# Altium PCB Glucometer-E.C.- Full V1.PcbDoc
Units mm, origin at the board's own origin, x right, y up, seen from the top; angles counter-clockwise.
Board outline 152.4 x 101.6 mm, 2 copper layers (Top Layer, Bottom Layer); 12 components, 68 nets, 98 pads, 0 vias.
Unrouted connection lines stored in the file: 21.
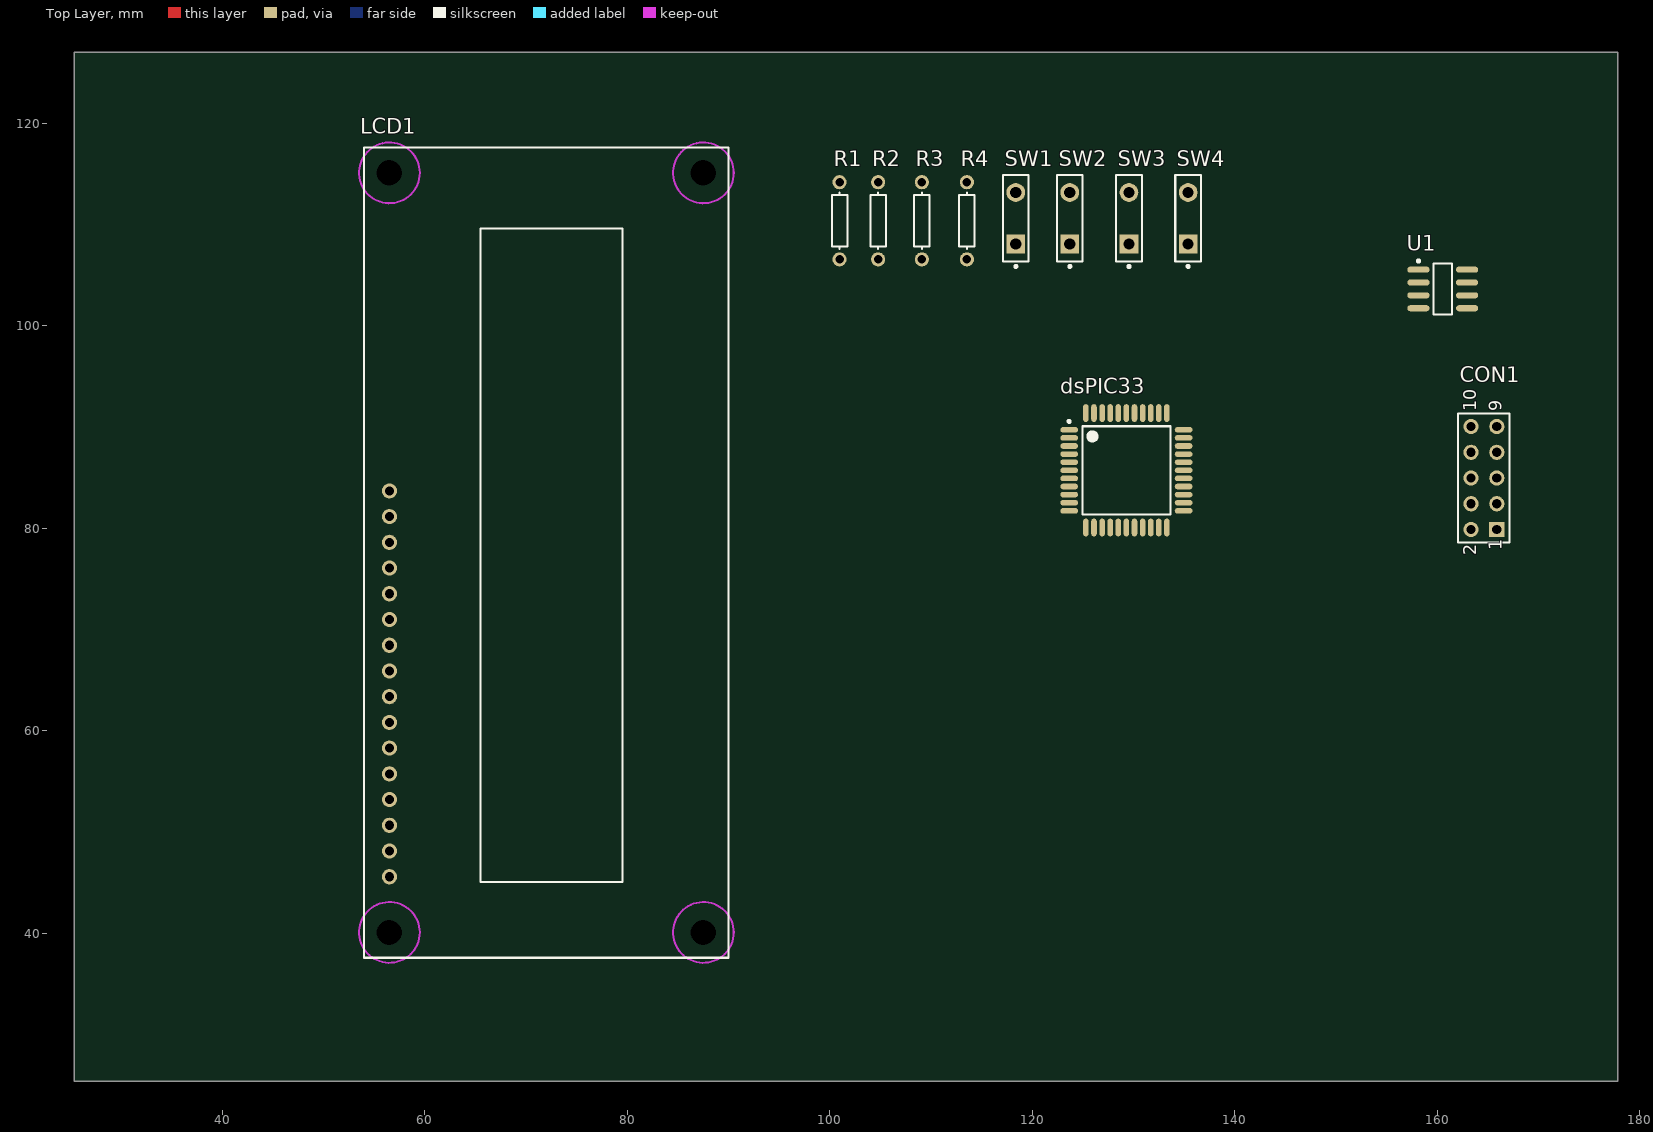
[diagram p0: Top Layer view]
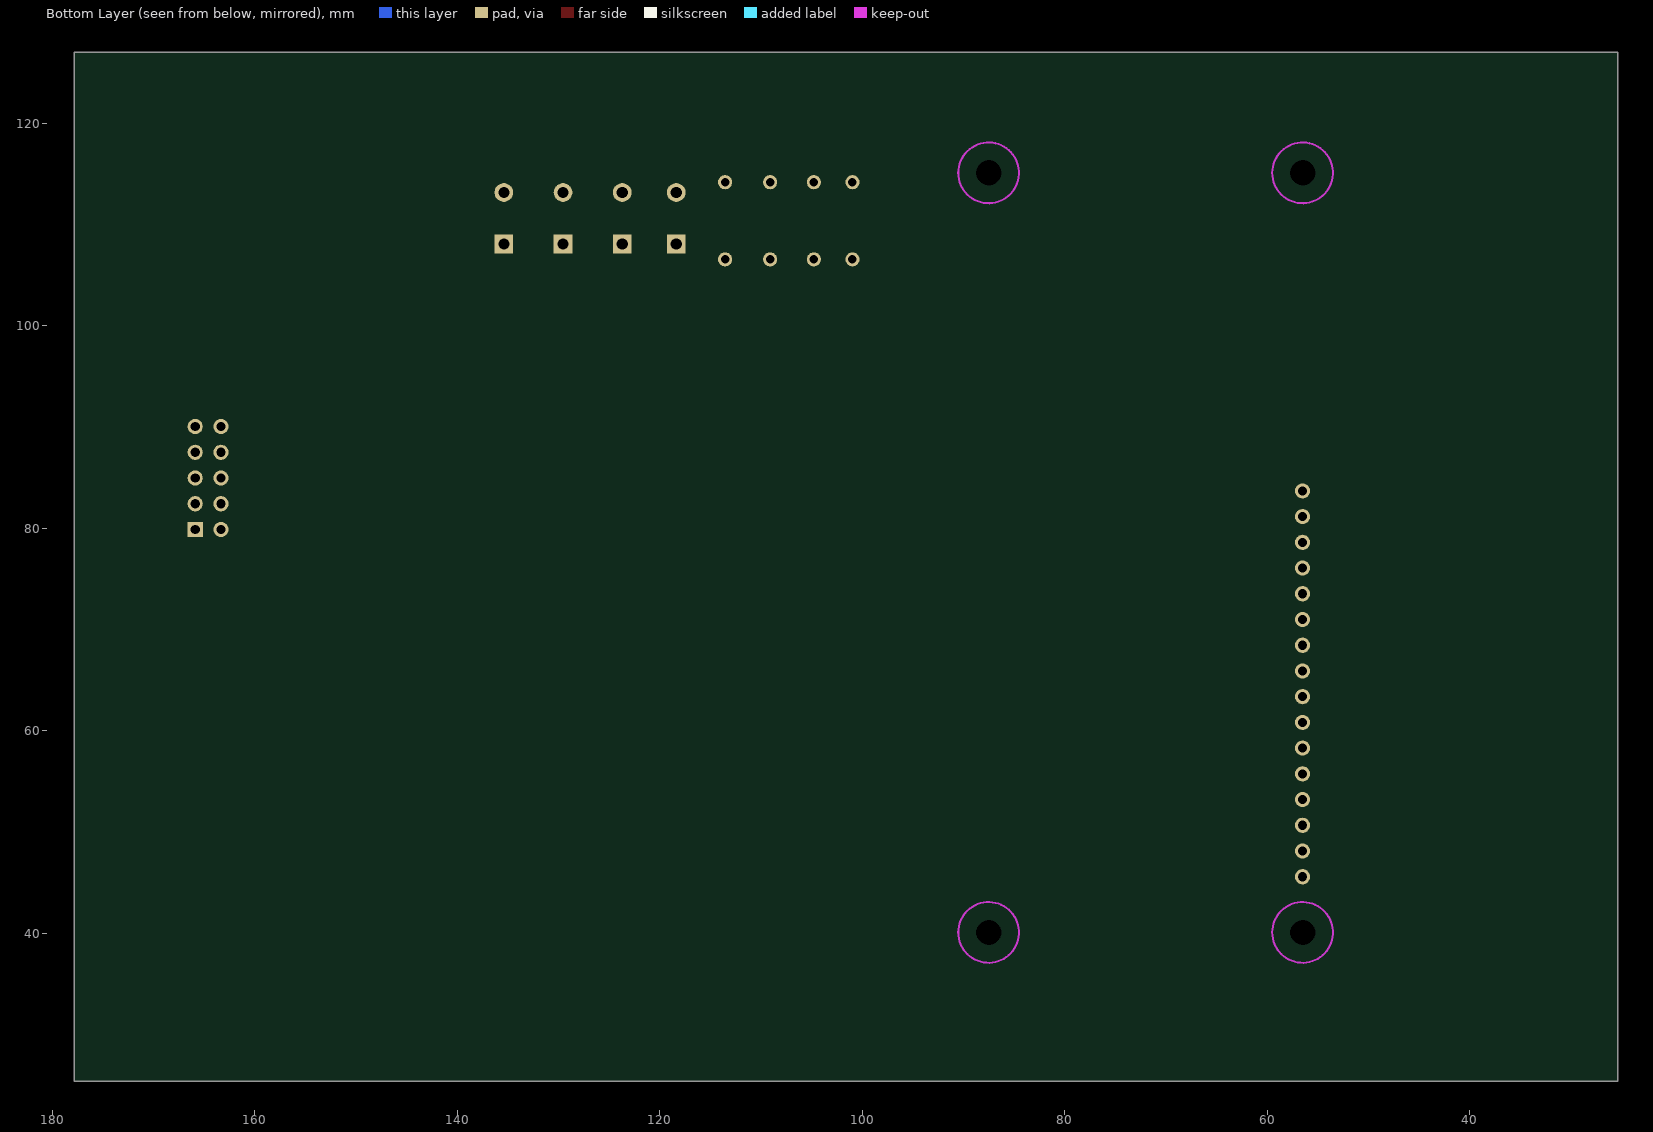
[diagram p1: Bottom Layer view, seen from below]

## Layer stack, top to bottom
Top Layer: signal copper 0.0356
Dielectric: dielectric 0.32, FR-4, Dk 4.8
Bottom Layer: signal copper 0.0356

## Board outline
25.4,25.4 177.8,25.4 177.8,127 25.4,127

## Design rules (kind name [scope] priority, off if disabled: settings)
Clearance [All] p1: gap=0.25
PolygonConnect [All] p1: connectstyle=Relief reliefconductorwidth=0.254 reliefentries=4 polygonreliefangle="90 Angle" airgapwidth=0.254
RoutingVias [All] p1: holewidth=0.711 width=1.27 viastyle="Through Hole" minholewidth=0.711 minwidth=1.27 maxholewidth=0.711 maxwidth=1.27
SolderMaskExpansion [All] p1: expansion=0.102
Width [All] p1: maxlimit=5 minlimit=0.25 preferedwidth=0.3 minimp=50.000000 maximp=50.000000 favimp=50.000000
28 further rules are at their usual default settings.

## Components (designator, comment, footprint, x,y, rotation, side; value= is the part's Value field where it differs from the comment)
CON1 "Header 5X2" HDR2X5 165.862,79.883 r90 top
dsPIC33 "DSPIC33FJ64MC804-I/PT" TQFP-PT44_N 129.286,85.725 r0 top
LCD1 "162A" 162A 56.515,45.593 r90 top
R1 "Res1" AXIAL-0.3 100.965,110.363 r90 top
R2 "Res1" AXIAL-0.3 104.775,110.363 r90 top
R3 "Res1" AXIAL-0.3 109.093,110.363 r90 top
R4 "Res1" AXIAL-0.3 113.538,110.363 r90 top
SW1 "SW-PB" SPST-2 118.364,110.617 r90 top
SW2 "SW-PB" SPST-2 123.698,110.617 r90 top
SW3 "SW-PB" SPST-2 129.54,110.617 r90 top
SW4 "SW-PB" SPST-2 135.382,110.617 r90 top
U1 "24AA1025-I/SN" SOIC-SN8_N 160.528,103.632 r0 top

## Footprints (in the part's own frame and the unit in brackets; to place one, negate y for a bottom-side part, rotate by r counter-clockwise, add the part's x,y. Pads: shape width x height; smd on the part's side, far side on the other; paste and mask are expansions set on the pad)
162A [mm]
  round 1.5 hole 0.9: 1(0,0) 2(2.54,0) 3(5.08,0) 4(7.62,0) 5(10.16,0) 6(12.7,0) 7(15.24,0) 8(17.78,0) 9(20.32,0) 10(22.86,0) 11(25.4,0) 12(27.94,0) 13(30.48,0) 14(33.02,0) 15(35.56,0) 16(38.1,0)
  round 2.3 hole 2.5 unplated: M1(-5.5,0) M2(69.5,0) M3(-5.5,-31) M4(69.5,-31)
  Keep-Out Layer circle w0.2: c69.5,0 r3
  Keep-Out Layer circle w0.2: c69.5,-31 r3
  Keep-Out Layer circle w0.2: c-5.5,-31 r3
  Keep-Out Layer circle w0.2: c-5.5,0 r3
  silkscreen extent -8,-33.5 72,2.5, body extent -8.01,-33.5 72,2.5, height 10.16
AXIAL-0.3 [mm] "Axial Device, Thru-Hole; 2 Leads; 0.3 in Pin Spacing"
  round 1.4 hole 0.85: 1(-3.81,0) 2(3.81,0)
  silkscreen extent -2.77,-0.76 2.77,0.76
HDR2X5 [mm] "Connector; Header; 5x2 Position"
  rect 1.5x1.5 hole 0.9: 1(0,0)
  round 1.5 hole 0.9: 2(0,2.54) 3(2.54,0) 4(2.54,2.54) 5(5.08,0) 6(5.08,2.54) 7(7.62,0) 8(7.62,2.54) 9(10.16,0) 10(10.16,2.54)
  silkscreen extent -1.27,-1.27 11.43,3.81
SOIC-SN8_N [mm] "SOIC, 8-Leads, Body 4.9x3.8mm, Pitch 1.27mm, IPC Medium Density"
  oval 2.2x0.6 smd: 1(-2.4,1.905) 2(-2.4,0.635) 3(-2.4,-0.635) 4(-2.4,-1.905) 5(2.4,-1.905) 6(2.4,-0.635) 7(2.4,0.635) 8(2.4,1.905)
  silkscreen extent -2.52,-2.5 0.9,2.88, body extent -2,-2.5 2,2.5, height 1.75
SPST-2 [mm] "Switch; 2 Leads"
  rect 1.85x1.85 hole 1.1: 1(-2.54,0)
  round 1.85 hole 1.1: 2(2.54,0)
  silkscreen extent -4.89,-1.27 4.28,1.27
TQFP-PT44_N [mm] "Thin QFP, 44-Leads, Body 10x10mm, Pitch 0.8mm, IPC Medium Density"
  oval 1.75x0.55 smd: 1(-5.65,4) 2(-5.65,3.2) 3(-5.65,2.4) 4(-5.65,1.6) 5(-5.65,0.8) 6(-5.65,0) 7(-5.65,-0.8) 8(-5.65,-1.6) 9(-5.65,-2.4) 10(-5.65,-3.2) 11(-5.65,-4) 23(5.65,-4) 24(5.65,-3.2) 25(5.65,-2.4) 26(5.65,-1.6) 27(5.65,-0.8) 28(5.65,0) 29(5.65,0.8) 30(5.65,1.6) 31(5.65,2.4) 32(5.65,3.2) 33(5.65,4)
  oval 0.55x1.75 smd: 12(-4,-5.65) 13(-3.2,-5.65) 14(-2.4,-5.65) 15(-1.6,-5.65) 16(-0.8,-5.65) 17(0,-5.65) 18(0.8,-5.65) 19(1.6,-5.65) 20(2.4,-5.65) 21(3.2,-5.65) 22(4,-5.65) 34(4,5.65) 35(3.2,5.65) 36(2.4,5.65) 37(1.6,5.65) 38(0.8,5.65) 39(0,5.65) 40(-0.8,5.65) 41(-1.6,5.65) 42(-2.4,5.65) 43(-3.2,5.65) 44(-4,5.65)
  silkscreen extent -5.77,-4.35 4.35,4.95, body extent -5,-5 5,5, height 1.2

## Part data
CON1: "Header, 5-Pin, Dual row"
dsPIC33: "High-Performance 16-bit Digital Signal Controller, 64 KB Flash, 16 KB RAM, 44-Pin TQFP, Industrial Temperature"
LCD1: "16 char * 2 line LCD character display with b/light"
R1 R2 R3 R4: "Resistor"
SW1 SW2 SW3 SW4: "Switch"
U1: "1 Mbit, 400kHz, 1.7V, 8-Pin SOIC 150mil, Industrial Temperature"

## Nets (pads, with @x,y where several pads share a name; then routed paths per layer and width w, separated by ;. In a path a pad name is that pad's centre, name@x,y a point inside that pad or via, vN(x,y) a via of type N, cw(c..) or ccw(c..) an arc to the next point about the centre after c; other vN are vias at no path point)
3.3V: CON1.10 dsPIC33.17 dsPIC33.28 dsPIC33.40 SW1.2 SW2.2 SW3.2 SW4.2 U1.8
GND: CON1.8 dsPIC33.6 dsPIC33.16 dsPIC33.29 dsPIC33.39 R1.1 R2.1 R3.1 R4.1 U1.4
NetCON1_1: CON1.1
NetCON1_2: CON1.2
NetCON1_3: CON1.3
NetCON1_4: CON1.4
NetCON1_6: CON1.6
NetCON1_7: CON1.7
NetCON1_9: CON1.9
NetdsPIC33_1: dsPIC33.1
NetdsPIC33_2: dsPIC33.2
NetdsPIC33_3: dsPIC33.3
NetdsPIC33_4: dsPIC33.4
NetdsPIC33_5: dsPIC33.5
NetdsPIC33_7: dsPIC33.7
NetdsPIC33_8: dsPIC33.8
NetdsPIC33_9: dsPIC33.9
NetdsPIC33_10: dsPIC33.10
NetdsPIC33_11: dsPIC33.11
NetdsPIC33_12: dsPIC33.12
NetdsPIC33_13: dsPIC33.13
NetdsPIC33_14: dsPIC33.14
NetdsPIC33_15: dsPIC33.15
NetdsPIC33_18: dsPIC33.18
NetdsPIC33_19: dsPIC33.19
NetdsPIC33_20: dsPIC33.20
NetdsPIC33_21: dsPIC33.21
NetdsPIC33_22: dsPIC33.22
NetdsPIC33_23: dsPIC33.23
NetdsPIC33_24: dsPIC33.24
NetdsPIC33_25: dsPIC33.25
NetdsPIC33_26: dsPIC33.26
NetdsPIC33_27: dsPIC33.27
NetdsPIC33_30: dsPIC33.30
NetdsPIC33_31: dsPIC33.31
NetdsPIC33_32: dsPIC33.32
NetdsPIC33_33: dsPIC33.33
NetdsPIC33_34: dsPIC33.34
NetdsPIC33_35: dsPIC33.35
NetdsPIC33_36: dsPIC33.36
NetdsPIC33_37: dsPIC33.37
NetdsPIC33_38: dsPIC33.38
NetdsPIC33_41: dsPIC33.41
NetdsPIC33_42: dsPIC33.42
NetdsPIC33_43: dsPIC33.43
NetdsPIC33_44: dsPIC33.44
NetLCD1_1: LCD1.1
NetLCD1_2: LCD1.2
NetLCD1_3: LCD1.3
NetLCD1_4: LCD1.4
NetLCD1_5: LCD1.5
NetLCD1_6: LCD1.6
NetLCD1_11: LCD1.11
NetLCD1_12: LCD1.12
NetLCD1_13: LCD1.13
NetLCD1_14: LCD1.14
NetLCD1_15: LCD1.15
NetLCD1_16: LCD1.16
NetR1_2: R1.2 SW1.1
NetR2_2: R2.2 SW2.1
NetR3_2: R3.2 SW3.1
NetR4_2: R4.2 SW4.1
NetU1_1: U1.1
NetU1_2: U1.2
NetU1_3: U1.3
NetU1_5: U1.5
NetU1_6: U1.6
NetU1_7: U1.7
pads on no net: CON1.5 LCD1.7 LCD1.8 LCD1.9 LCD1.10 LCD1.M1 LCD1.M2 LCD1.M3 LCD1.M4

## Text inside footprints (layer, text, board x,y; h text height)
CON1: Top Overlay "10" at 163.83,91.567 h1.27 r90; Top Overlay "9" at 166.37,91.567 h1.27 r90; Top Overlay "1" at 166.37,77.851 h1.27 r90; Top Overlay "2" at 163.83,77.343 h1.27 r90